# Altium PCB STM32_Blue pill.PcbDoc
Units mil, origin at the board's own origin, x right, y up, seen from the top; angles counter-clockwise.
Board outline 2215.03 x 1025.03 mil, 2 copper layers (Top Layer, Bottom Layer); 36 components, 52 nets, 176 pads, 42 vias.
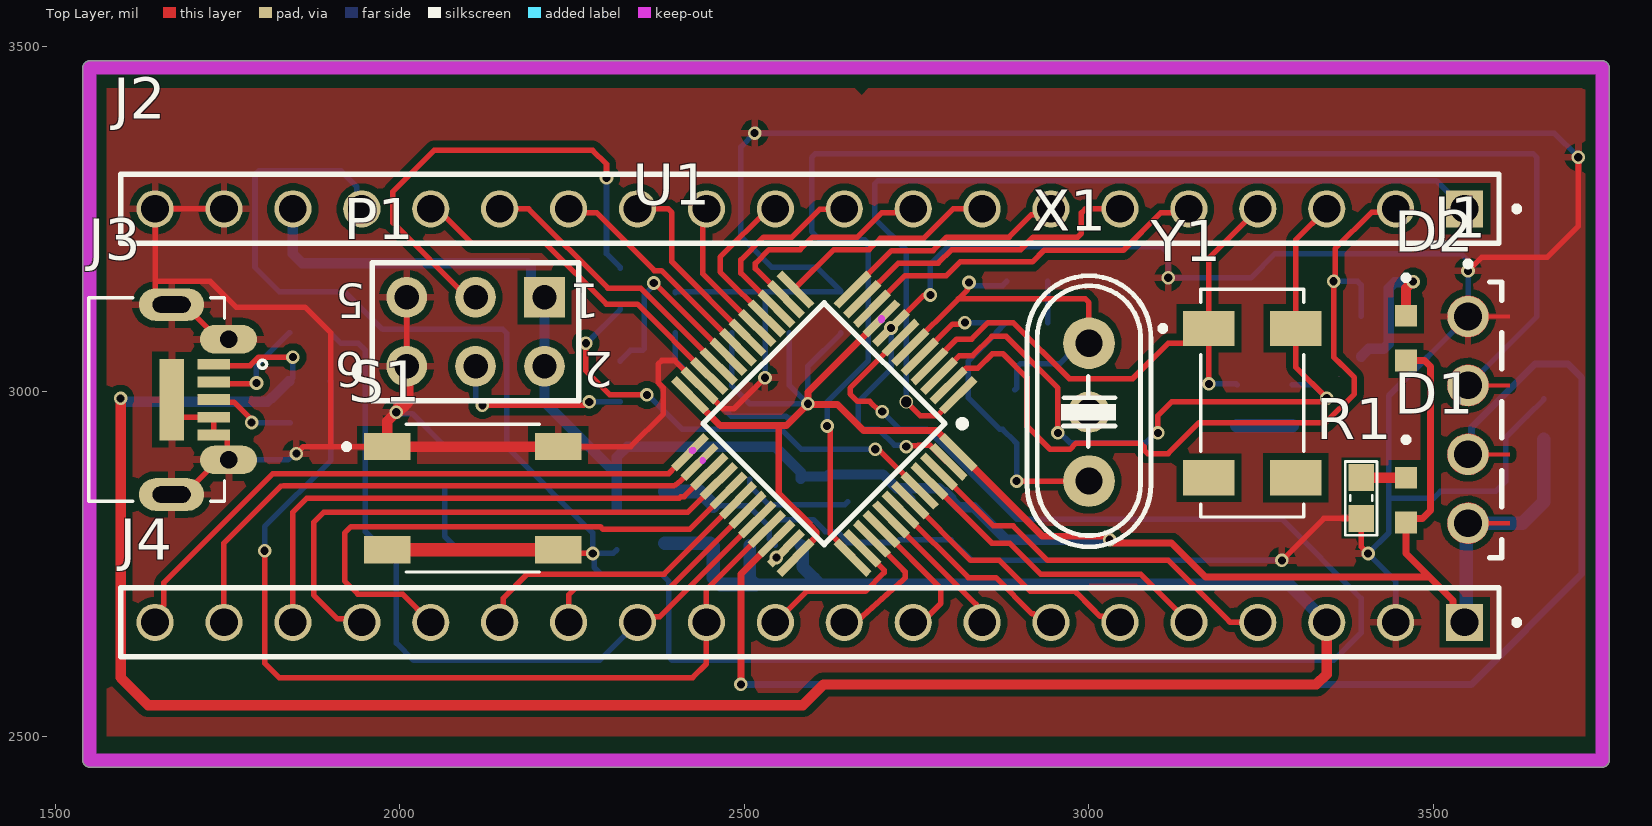
[diagram p0: Top Layer view]
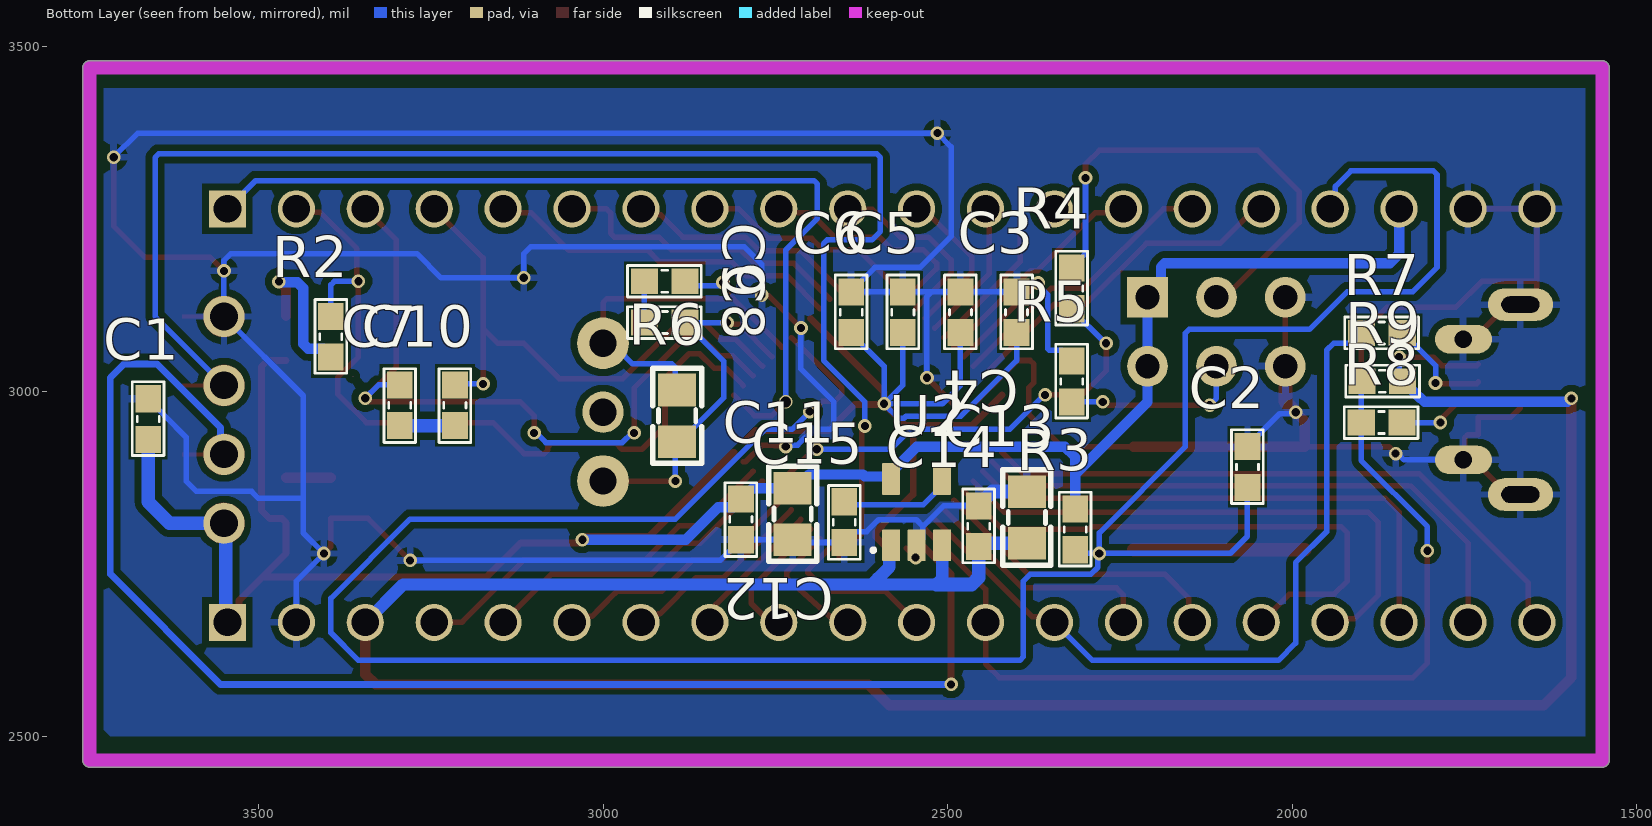
[diagram p1: Bottom Layer view, seen from below]
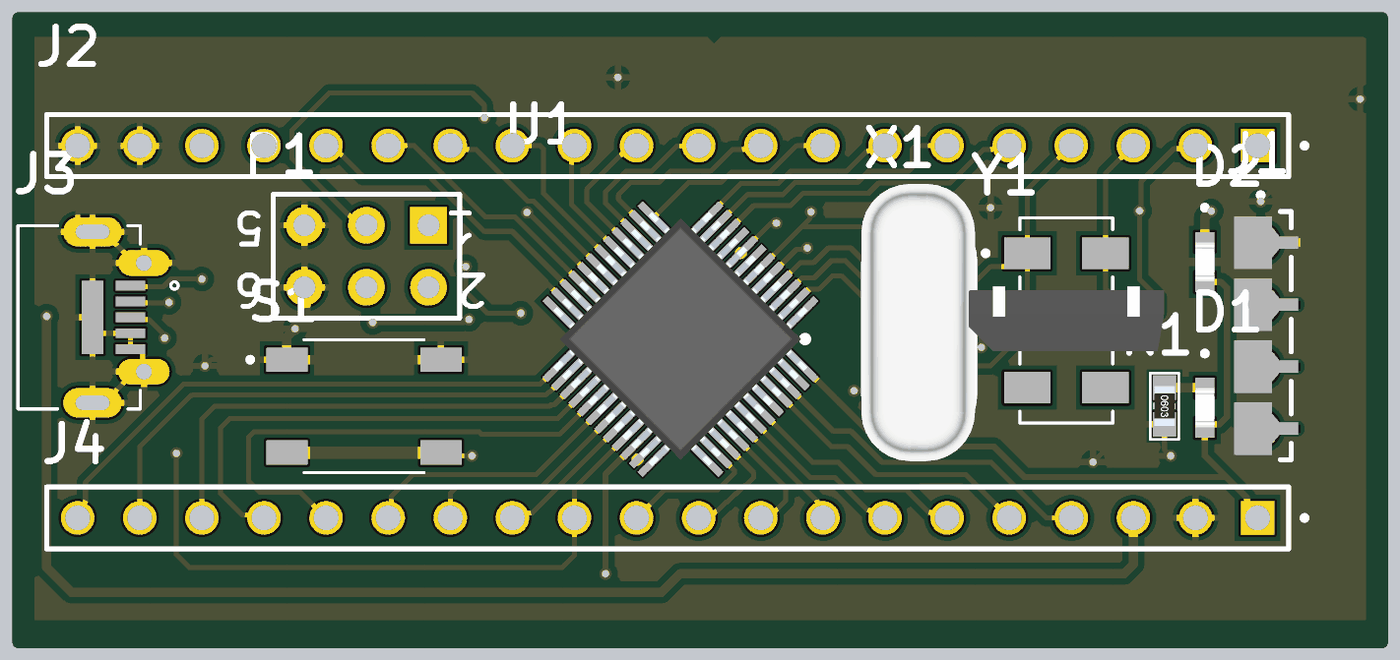
[diagram p2: 3D render of the assembled board from above, using the file's embedded part models]
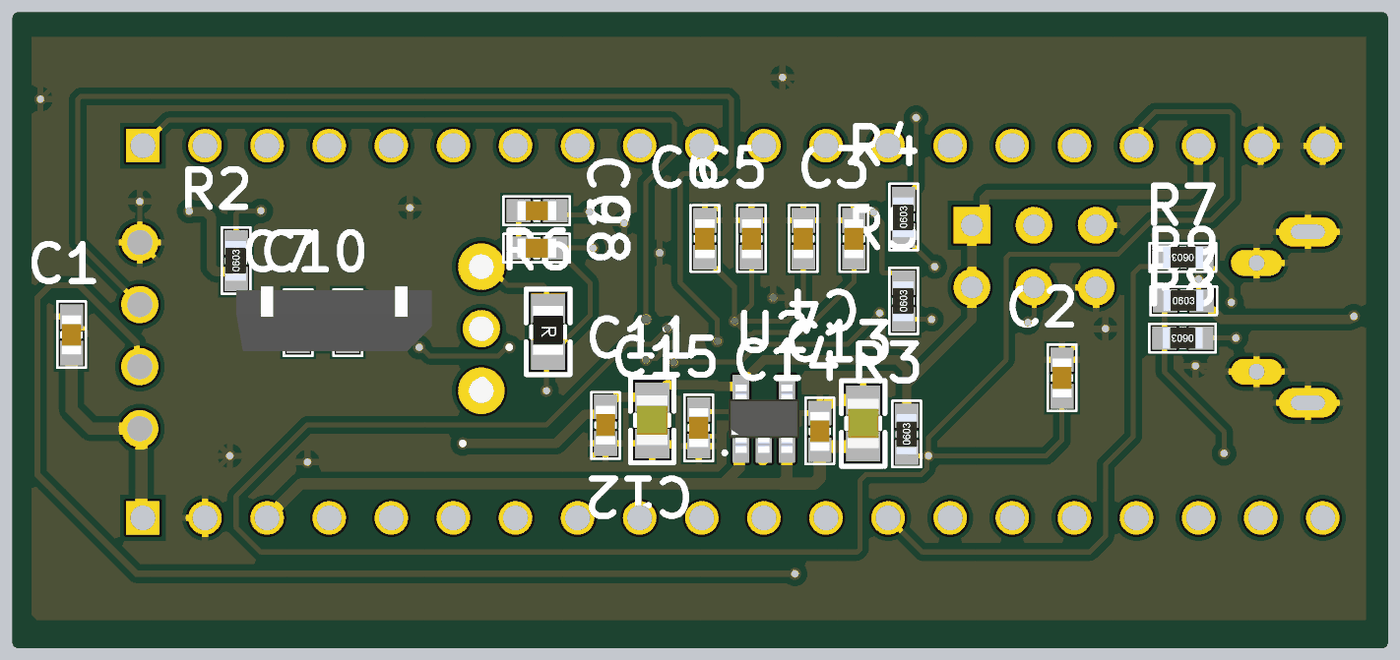
[diagram p3: 3D render of the assembled board from below, using the file's embedded part models]

## Layer stack, top to bottom
Top Solder: solder mask 0.4, Solder Resist, Dk 3.5
Top Layer: signal copper 1.4
Dielectric 1: dielectric 12.6, FR-4, Dk 4.8
Bottom Layer: signal copper 1.4
Bottom Solder: solder mask 0.4, Solder Resist, Dk 3.5

## Board outline
1550,2454.99 cw(c1550,2465) 1539.98,2465 1539.98,3470 cw(c1550,3470) 1550,3480.01 3745,3480.01 cw(c3745,3470) 3755.01,3470 3755.01,2465 cw(c3745,2465) 3745,2454.99

## Design rules (kind name [scope] priority, off if disabled: settings)
Clearance Clearance_1 [All] p1: gap=10 ignorepadtopadclearanceinfootprint=FALSE
Clearance Clearance_1 [OnMid vs OnMid] p2: gap=10 ignorepadtopadclearanceinfootprint=FALSE sourcerule=43 cellrowname=All cellrowtype=0 cellcolname=All cellcoltype=0 innerlayers=TRUE
Clearance Clearance_2 [(ExistsOnLayer('Top Layer') Or ExistsOnLayer('Bottom Layer')) vs (ExistsOnLayer('Top Layer') Or ExistsOnLayer('Bottom Layer'))] p3: gap=10 ignorepadtopadclearanceinfootprint=FALSE sourcerule=43 cellrowname=All cellrowtype=0 cellcolname=All cellcoltype=0 outerlayers=TRUE
Clearance [All] p4: gap=10 ignorepadtopadclearanceinfootprint=FALSE ismatrix=TRUE
PolygonConnect [All] p1: connectstyle=Relief reliefconductorwidth=10 reliefentries=4 polygonreliefangle="90 Angle" airgapwidth=10
RoutingPriority RoutingPriority_1 [All] p1: routingpriority=0
RoutingVias RoutingViaStyle_1 [All] p1: holewidth=10 width=19.68 viastyle="Through Hole" minholewidth=15.75 minwidth=15.75 maxholewidth=10 maxwidth=27.56
RoutingVias [All] p2: holewidth=28 width=50 viastyle="Through Hole" minholewidth=28 minwidth=50 maxholewidth=28 maxwidth=50
ShortCircuit ShortCircuit_1 [All] p1: allowed=FALSE
ShortCircuit [All] p2: allowed=FALSE
SolderMaskExpansion [All] p1: expansion=4 istentingtop=FALSE
SupplyNets "Schematic Supply Nets_2" [InNet('5V')] p1: voltage=0.000
SupplyNets "Schematic Supply Nets_1" [InNet('3.3V')] p2: voltage=0.000
SupplyNets "Schematic Supply Nets" [InNet('GND')] p3: voltage=0.000
Width MaxMinWidth_1 [All] p1: maxlimit=20 minlimit=8 preferedwidth=15 minimp=50.000000 maximp=50.000000 favimp=50.000000
Width [All] p2: maxlimit=10 minlimit=10 preferedwidth=10
28 further rules are at their usual default settings.

## Classes and differential pairs
component class Sheet1: C1 C2 C3 C4 C5 C6 C7 C9 C10 C11 C12 C13 C14 C15 D1 D2 J1 J2 J3 J4 P1 R1 R2 R3 R4 R5 R6 R8 S1 U1 U2 X1 Y1

## Components (designator, comment, footprint, x,y, rotation, side; value= is the part's Value field where it differs from the comment)
C1 "104" "tu 0603" 3660,2960 r90 bottom
C2 "105" "tu 0603" 2065,2890.47 r90 bottom
C3 "104" "tu 0603" 2400,3115 r90 bottom
C4 "104" "tu 0603" 2481.48,3115 r90 bottom
C5 "104" "tu 0603" 2565,3115 r90 bottom
C6 "104" "tu 0603" 2640,3115 r90 bottom
C7 "22pF" "tu 0603" 3295,2980 r270 bottom
C8 "22pF" "tu 0603" 2910.47,3100 r0 bottom
C9 "22pF" "tu 0603" 2910.47,3160 r0 bottom
C10 "22pF" "tu 0603" 3215,2980 r270 bottom
C11 "106" "tu 0805" 2724.87,2822.57 r270 bottom
C12 "104" "tu 0603" 2800,2814.53 r270 bottom
C13 "105" "tu 0805" 2385.13,2817.23 r90 bottom
C14 "104" "tu 0603" 2455,2804.53 r90 bottom
C15 "22pF" "tu 0603" 2650,2810.47 r270 bottom
D1 "LED" LED_KP-1608SURCK 3460,2842.52 r270 top
D2 "LED" LED_KP-1608SURCK 3460,3077.48 r270 top
J1 "MTLW-104-X-X-S-X" SAMTEC_MTLW-104-X-X-S-X 3550,2958.86 r90 top
J2 "TSW-120-05-T-S-LL" SAMTEC_TSW-120-05-T-S-LL 3545,3265 r180 top
J3 "UJ2-MIBH2-4-SMT" CUI_UJ2-MIBH2-4-SMT 1730,3039.52 r0 top
J4 "TSW-120-05-T-S-LL" SAMTEC_TSW-120-05-T-S-LL 3545,2665 r180 top
P1 "Header 3X2" HDR2X3 2210,3136.7 r180 top
R1 "510R" "tro smd 0603" 3395,2845.47 r270 top
R2 "510R" "tro smd 0603" 3395,3079.53 r90 bottom
R3 "10k" "tro smd 0603" 2315,2799.92 r90 bottom
R4 "100k" "tro smd 0603" 2320,3149.53 r90 bottom
R5 "100k" "tro smd 0603" 2320,3014.53 r90 bottom
R6 "1M" "tro smd 0805" 2890,2965 r270 bottom
R7 "220R" "tro smd 0603" 1870,3085 r0 bottom
R8 "220R" "tro smd 0603" 1870.47,2955 r0 bottom
R9 "4.7k" "tro smd 0603" 1869.53,3015 r180 bottom
S1 "Reset" SW_8-1437565-1 2105.98,2845.2 r0 top
U1 "STM32F103C8T6" LQFP-48_19.6_393_58X11_SMD 2615.74,2953.3 r225 top
U2 "RT9193-33GB" SOT94P279X129-5N 2545,2825 r90 bottom
X1 "8Mhz" XT2 3000,2970 r270 top value=4Mhz
Y1 "ABS25-32-768KHZ-T" XTAL_ABS25-32-768KHZ-T 3237.01,2983.27 r0 top

## Footprints (in the part's own frame and the unit in brackets; to place one, negate y for a bottom-side part, rotate by r counter-clockwise, add the part's x,y. Pads: shape width x height; smd on the part's side, far side on the other; paste and mask are expansions set on the pad)
CUI_UJ2-MIBH2-4-SMT [mm]
  rect 1.2x0.4 smd: 1(0,0) 2(0,-0.65) 3(0,-1.3) 4(0,-1.95) 5(0,-2.6)
  oval 2.4x1.2 hole 0.6 slot 1.4 at 0 deg: SH1(-1.55,2.2) SH4(-1.55,-4.8)
  oval 2.1x1.05 hole 0.65: SH2(0.55,0.925) SH5(0.55,-3.525)
  rect 0.9x3 smd: SH3(-1.55,-1.3)
  silkscreen extent -4.6,-5.05 1.95,2.45
HDR2X3 [mm] "Connector; Header; 3x2 Position"
  rect 1.5x1.5 hole 0.9: 1(0,0)
  round 1.5 hole 0.9: 2(0,2.54) 3(2.54,0) 4(2.54,2.54) 5(5.08,0) 6(5.08,2.54)
  silkscreen extent -1.27,-1.27 6.35,3.81, body extent -1.27,-1.27 6.35,3.81, height 7
LED_KP-1608SURCK [mm]
  rect 0.8x0.8 smd: 1(0.825,0) 2(-0.825,0)
  silkscreen extent -2.32,-0.1 -2.13,0.1, body extent -0.8,-0.4 0.8,0.4, height 1.1
LQFP-48_19.6_393_58X11_SMD [mm] "48LQFP"
  rect 1.7x0.3 smd mask+0.076: 1(-4.238,2.75) 2(-4.238,2.25) 3(-4.238,1.75) 4(-4.238,1.25) 5(-4.238,0.75) 6(-4.238,0.25) 7(-4.238,-0.25) 8(-4.238,-0.75) 9(-4.238,-1.25) 10(-4.238,-1.75) 11(-4.238,-2.25) 12(-4.238,-2.75) 25(4.238,-2.75) 26(4.238,-2.25) 27(4.238,-1.75) 28(4.238,-1.25) 29(4.238,-0.75) 30(4.238,-0.25) 31(4.238,0.25) 32(4.238,0.75) 33(4.238,1.25) 34(4.238,1.75) 35(4.238,2.25) 36(4.238,2.75)
  rect 0.3x1.7 smd mask+0.076: 13(-2.75,-4.238) 14(-2.25,-4.238) 15(-1.75,-4.238) 16(-1.25,-4.238) 17(-0.75,-4.238) 18(-0.25,-4.238) 19(0.25,-4.238) 20(0.75,-4.238) 21(1.25,-4.238) 22(1.75,-4.238) 23(2.25,-4.238) 24(2.75,-4.238) 37(2.75,4.238) 38(2.25,4.238) 39(1.75,4.238) 40(1.25,4.238) 41(0.75,4.238) 42(0.25,4.238) 43(-0.25,4.238) 44(-0.75,4.238) 45(-1.25,4.238) 46(-1.75,4.238) 47(-2.25,4.238) 48(-2.75,4.238)
  silkscreen extent -3.72,-3.15 3.15,3.72, body extent -4.5,-4.5 4.5,4.5, height 1.7
SAMTEC_MTLW-104-X-X-S-X [mm]
  round 1.52 hole 1.02: 01(3.81,0) 02(1.27,0) 03(-1.27,0) 04(-3.81,0)
  Top Layer region: 3.889,0.756 3.968,0.743 4.045,0.723 4.119,0.694 4.19,0.658 4.257,0.615 4.319,0.565 4.375,0.509 4.425,0.447 4.468,0.38 4.504,0.309 4.533,0.235 4.553,0.158 4.566,0.079 4.57,0 4.569,-0.038 4.566,-0.076 4.562,-0.113 4.555,-0.151 4.547,-0.187 4.537,-0.224 4.525,-0.259 4.511,-0.294 4.496,-0.329 4.479,-0.363 4.46,-0.395 4.44,-0.427 4.418,-0.458 4.395,-0.487 4.37,-0.516 4.344,-0.543 4.316,-0.569 4.287,-0.593 4.258,-0.616 4.227,-0.638 4.195,-0.658 4.162,-0.676 4.128,-0.692 4.093,-0.707 4.058,-0.721 4.022,-0.732 3.986,-0.742 3.949,-0.75 3.912,-0.756 3.875,-0.76 3.875,-1.53 3.745,-1.53 3.745,-0.76 3.708,-0.756 3.671,-0.75 3.634,-0.742 3.598,-0.732 3.562,-0.721 3.527,-0.707 3.492,-0.692 3.458,-0.676 3.425,-0.658 3.393,-0.638 3.362,-0.616 3.333,-0.593 3.304,-0.569 3.276,-0.543 3.25,-0.516 3.225,-0.487 3.202,-0.458 3.18,-0.427 3.16,-0.395 3.141,-0.363 3.124,-0.329 3.109,-0.294 3.095,-0.259 3.083,-0.224 3.073,-0.187 3.065,-0.151 3.058,-0.113 3.054,-0.076 3.051,-0.038 3.05,0 3.054,0.079 3.067,0.158 3.087,0.235 3.116,0.309 3.152,0.38 3.195,0.447 3.245,0.509 3.301,0.565 3.363,0.615 3.43,0.658 3.501,0.694 3.575,0.723 3.652,0.743 3.731,0.756 3.81,0.76
  Top Layer region: 1.349,0.756 1.428,0.743 1.505,0.723 1.579,0.694 1.65,0.658 1.717,0.615 1.779,0.565 1.835,0.509 1.885,0.447 1.928,0.38 1.964,0.309 1.993,0.235 2.013,0.158 2.026,0.079 2.03,0 2.029,-0.038 2.026,-0.076 2.022,-0.113 2.015,-0.151 2.007,-0.187 1.997,-0.224 1.985,-0.259 1.971,-0.294 1.956,-0.329 1.939,-0.363 1.92,-0.395 1.9,-0.427 1.878,-0.458 1.855,-0.487 1.83,-0.516 1.804,-0.543 1.776,-0.569 1.747,-0.593 1.718,-0.616 1.687,-0.638 1.655,-0.658 1.622,-0.676 1.588,-0.692 1.553,-0.707 1.518,-0.721 1.482,-0.732 1.446,-0.742 1.409,-0.75 1.372,-0.756 1.335,-0.76 1.335,-1.53 1.205,-1.53 1.205,-0.76 1.168,-0.756 1.131,-0.75 1.094,-0.742 1.058,-0.732 1.022,-0.721 0.987,-0.707 0.952,-0.692 0.918,-0.676 0.885,-0.658 0.853,-0.638 0.822,-0.616 0.793,-0.593 0.764,-0.569 0.736,-0.543 0.71,-0.516 0.685,-0.487 0.662,-0.458 0.64,-0.427 0.62,-0.395 0.601,-0.363 0.584,-0.329 0.569,-0.294 0.555,-0.259 0.543,-0.224 0.533,-0.187 0.525,-0.151 0.518,-0.113 0.514,-0.076 0.511,-0.038 0.51,0 0.514,0.079 0.527,0.158 0.547,0.235 0.576,0.309 0.612,0.38 0.655,0.447 0.705,0.509 0.761,0.565 0.823,0.615 0.89,0.658 0.961,0.694 1.035,0.723 1.112,0.743 1.191,0.756 1.27,0.76
  Top Layer region: -1.191,0.756 -1.112,0.743 -1.035,0.723 -0.961,0.694 -0.89,0.658 -0.823,0.615 -0.761,0.565 -0.705,0.509 -0.655,0.447 -0.612,0.38 -0.576,0.309 -0.547,0.235 -0.527,0.158 -0.514,0.079 -0.51,0 -0.511,-0.038 -0.514,-0.076 -0.518,-0.113 -0.525,-0.151 -0.533,-0.187 -0.543,-0.224 -0.555,-0.259 -0.569,-0.294 -0.584,-0.329 -0.601,-0.363 -0.62,-0.395 -0.64,-0.427 -0.662,-0.458 -0.685,-0.487 -0.71,-0.516 -0.736,-0.543 -0.764,-0.569 -0.793,-0.593 -0.822,-0.616 -0.853,-0.638 -0.885,-0.658 -0.918,-0.676 -0.952,-0.692 -0.987,-0.707 -1.022,-0.721 -1.058,-0.732 -1.094,-0.742 -1.131,-0.75 -1.168,-0.756 -1.205,-0.76 -1.205,-1.53 -1.335,-1.53 -1.335,-0.76 -1.372,-0.756 -1.409,-0.75 -1.446,-0.742 -1.482,-0.732 -1.518,-0.721 -1.553,-0.707 -1.588,-0.692 -1.622,-0.676 -1.655,-0.658 -1.687,-0.638 -1.718,-0.616 -1.747,-0.593 -1.776,-0.569 -1.804,-0.543 -1.83,-0.516 -1.855,-0.487 -1.878,-0.458 -1.9,-0.427 -1.92,-0.395 -1.939,-0.363 -1.956,-0.329 -1.971,-0.294 -1.985,-0.259 -1.997,-0.224 -2.007,-0.187 -2.015,-0.151 -2.022,-0.113 -2.026,-0.076 -2.029,-0.038 -2.03,0 -2.026,0.079 -2.013,0.158 -1.993,0.235 -1.964,0.309 -1.928,0.38 -1.885,0.447 -1.835,0.509 -1.779,0.565 -1.717,0.615 -1.65,0.658 -1.579,0.694 -1.505,0.723 -1.428,0.743 -1.349,0.756 -1.27,0.76
  Top Layer region: -3.731,0.756 -3.652,0.743 -3.575,0.723 -3.501,0.694 -3.43,0.658 -3.363,0.615 -3.301,0.565 -3.245,0.509 -3.195,0.447 -3.152,0.38 -3.116,0.309 -3.087,0.235 -3.067,0.158 -3.054,0.079 -3.05,0 -3.051,-0.038 -3.054,-0.076 -3.058,-0.113 -3.065,-0.151 -3.073,-0.187 -3.083,-0.224 -3.095,-0.259 -3.109,-0.294 -3.124,-0.329 -3.141,-0.363 -3.16,-0.395 -3.18,-0.427 -3.202,-0.458 -3.225,-0.487 -3.25,-0.516 -3.276,-0.543 -3.304,-0.569 -3.333,-0.593 -3.362,-0.616 -3.393,-0.638 -3.425,-0.658 -3.458,-0.676 -3.492,-0.692 -3.527,-0.707 -3.562,-0.721 -3.598,-0.732 -3.634,-0.742 -3.671,-0.75 -3.708,-0.756 -3.745,-0.76 -3.745,-1.53 -3.875,-1.53 -3.875,-0.76 -3.912,-0.756 -3.949,-0.75 -3.986,-0.742 -4.022,-0.732 -4.058,-0.721 -4.093,-0.707 -4.128,-0.692 -4.162,-0.676 -4.195,-0.658 -4.227,-0.638 -4.258,-0.616 -4.287,-0.593 -4.316,-0.569 -4.344,-0.543 -4.37,-0.516 -4.395,-0.487 -4.418,-0.458 -4.44,-0.427 -4.46,-0.395 -4.479,-0.363 -4.496,-0.329 -4.511,-0.294 -4.525,-0.259 -4.537,-0.224 -4.547,-0.187 -4.555,-0.151 -4.562,-0.113 -4.566,-0.076 -4.569,-0.038 -4.57,0 -4.566,0.079 -4.553,0.158 -4.533,0.235 -4.504,0.309 -4.468,0.38 -4.425,0.447 -4.375,0.509 -4.319,0.565 -4.257,0.615 -4.19,0.658 -4.119,0.694 -4.045,0.723 -3.968,0.743 -3.889,0.756 -3.81,0.76
  silkscreen extent -5.08,-1.24 5.85,0.1
SAMTEC_TSW-120-05-T-S-LL [mm]
  rect 1.37x1.37 hole 1.02: 01(0,0)
  round 1.37 hole 1.02: 02(2.54,0) 03(5.08,0) 04(7.62,0) 05(10.16,0) 06(12.7,0) 07(15.24,0) 08(17.78,0) 09(20.32,0) 10(22.86,0) 11(25.4,0) 12(27.94,0) 13(30.48,0) 14(33.02,0) 15(35.56,0) 16(38.1,0) 17(40.64,0) 18(43.18,0) 19(45.72,0) 20(48.26,0)
  silkscreen extent -2.02,-1.27 49.53,1.27
SOT94P279X129-5N [mm]
  rrect12% 1.17x0.67 smd: 1(-1.22,0.94) 2(-1.22,0) 3(-1.22,-0.94) 4(1.22,-0.94) 5(1.22,0.94)
  silkscreen extent -1.47,1.53 -1.33,1.67, body extent -1.4,-1.45 1.4,1.45, height 1.3
SW_8-1437565-1 [mm]
  rect 1.7x1 smd: 1(-3.15,1.9) 2(3.15,1.9) 3(-3.15,-1.9) 4(3.15,-1.9)
  silkscreen extent -4.75,-2.72 2.45,2.72
"tro smd 0603" [mm] "Chip Capacitor, 2-Leads, Body 1,60x0,80mm, IPC Medium Density"
  rect 1x0.95 smd mask+0.076: 1(-0.75,0) 2(0.75,0)
  silkscreen extent -1.35,-0.58 1.37,0.58, body extent -0.82,-0.42 0.82,0.43, height 0.44
"tro smd 0805" [mm]
  rect 1.2x1.4 smd: 1(-0.946,-0.061) 2(0.954,-0.061)
  silkscreen extent -1.75,-0.97 1.75,0.84, body extent -1.56,-0.76 1.44,0.64, height 0.53
"tu 0603" [mm] "Chip Capacitor, 2-Leads, Body 1,60x0,80mm, IPC Medium Density"
  rect 1x0.95 smd mask+0.076: 1(-0.75,0) 2(0.75,0)
  silkscreen extent -1.35,-0.58 1.37,0.58, body extent -0.8,-0.4 0.8,0.4, height 0.9
"tu 0805" [mm] "Compoment SMD 80x50mil"
  rect 1.2x1.4 smd: 1(-0.946,-0.003) 2(0.954,-0.003)
  silkscreen extent -1.75,-0.89 1.75,0.89, body extent -1.01,-0.64 1.01,0.63, height 0.61
XT2 [mm] "Footpin for Crystal 2 pin"
  round 1.524 hole 1: 0(0,0)
  round 1.905 hole 1: 1(-2.54,0) 2(2.54,0)
  silkscreen extent -5.03,-2.29 4.96,2.29, body extent -5.93,-2.36 5.42,2.29, height 3.5
XTAL_ABS25-32-768KHZ-T [mm]
  rect 1.9x1.3 smd: 1(-1.6,2.75) 2(-1.6,-2.75) 3(1.6,-2.75) 4(1.6,2.75)
  silkscreen extent -3.4,-4.2 1.9,4.2, body extent -4,-1.25 4,1.41, height 2

## Part data
C1 C3 C4 C5 C6 C12 C14: library part "Tu 0603 104 50V 10%", "Dán", Chung_Loai=Dán, Don_Vi=Con, Ma_Hang=MH004568, So_Chan=2, Ten_Linh_Kien="Tụ 0603 104-100nF 10% 50V"
C2: library part "Tu 0603 105 50V 10%", "Dán", Chung_Loai=Dán, Don_Vi=Con, Ma_Hang=MH004569, So_Chan=2, Ten_Linh_Kien="Tụ 0603 105-1uF 50V 10%"
C7 C8 C9 C10 C15: library part "Tu 0603 22pF 50V 10%", "Dán", Chung_Loai=Dán, Don_Vi=Con, Ma_Hang=MH004570, So_Chan=2, Ten_Linh_Kien="Tụ 0603 22pF 50V 10%"
C11: library part "Tu 0805 106 16V 10%", "Dán", Chung_Loai=Dán, Don_Vi=Con, Ma_Hang=MH004553, So_Chan=2, Ten_Linh_Kien="Tụ 0805 106-10uF 10% 16V"
C13: library part "Tu 0805 105 50V 10%", "Dán", Chung_Loai=Dán, Don_Vi=Con, Ma_Hang=MH004552, So_Chan=2, Ten_Linh_Kien="Tụ 0805 105-1uF 10% 50V"
D1 D2: library part KP-1608SURCK, "LED; SMD; 0603; red; 50-150mcd; 1.6x0.8mm; 120Â°; 20mA;", Package="0603 Kingbright", Check_prices=https://www.snapeda.com/parts/KP-1608SURCK/Kingbright/view-part/?ref=eda, MF=Kingbright, MP=KP-1608SURCK, SnapEDA_Link=https://www.snapeda.com/parts/KP-1608SURCK/Kingbright/view-part/?ref=snap
J1 J2 J4: Package=None, Availability=Unavailable, Price=None
  J1: MF="{'manufacturer': u'Samtec Inc.'}", MP=MTLW-104-X-X-S-X
  J2 J4: MP=TSW-120-05-T-S-LL
J3: "Micro B, USB 2.0, 1.8 A, Right Angle, Surface Mount (SMT), USB Receptacle", Package=None, Availability="In Stock", Check_prices=https://www.snapeda.com/parts/UJ2-MIBH2-4-SMT/CUI+Devices/view-part/?ref=eda, CUI_purchase_URL=https://www.cuidevices.com/product/interconnect/connectors/usb-connectors/uj2-mibh2-4-smt?utm_source=snapeda.com&utm_medium=referral&utm_campaign=snapedaBOM, MF="CUI Devices", MP=UJ2-MIBH2-4-SMT, Price=None, Purchase-URL=https://pricing.snapeda.com/search/part/UJ2-MIBH2-4-SMT/?ref=eda, SnapEDA_Link=https://www.snapeda.com/parts/UJ2-MIBH2-4-SMT/CUI+Devices/view-part/?ref=snap
P1: "Header, 3-Pin, Dual row", LatestRevisionDate=17-Jul-2002, LatestRevisionNote="Re-released for DXP Platform.", Publisher="Altium Limited"
R1 R2: library part "Tro 0603 5% 510R", "Dán", Chung_Loai=Dán, Don_Vi=Con, Ma_Hang=MH007667, So_Chan=2, Ten_Linh_Kien="Trở 0603 5% 510R"
R3: library part "Tro 0603 1% 10k", "Dán", Chung_Loai=Dán, Don_Vi=Con, Ma_Hang=MH006333, So_Chan=2, Ten_Linh_Kien="Trở 0603 1% 10k"
R4 R5: library part "Tro 0603 5% 100k", "Dán", Chung_Loai=Dán, Don_Vi=Con, Ma_Hang=MH006314, So_Chan=2, Ten_Linh_Kien="Trở 0603 5% 100k"
R6: library part "Tro 0805 1% 1M", "Dán", Chung_Loai=Dán, Don_Vi=Con, Ma_Hang=MH005469, So_Chan=2, Ten_Linh_Kien="Trở 0805 1% 1M"
R7 R8: library part "Tro 0603 5% 220R", "Dán", Chung_Loai=Dán, Don_Vi=Con, Ma_Hang=MH006322, So_Chan=2, Ten_Linh_Kien="Trở 0603 5% 220R"
R9: library part "Tro 0603 5% 4.7k", "Dán", Chung_Loai=Dán, Don_Vi=Con, Ma_Hang=MH006327, So_Chan=2, Ten_Linh_Kien="Trở 0603 5% 4.7k"
S1: library part 8-1437565-1, Package=None, Availability=Unavailable, MP=8-1437565-1, Price=None
U1: library part IC_STM32F103C8T6, "ARM® Cortex®-M3 STM32F1 Microcontroller IC 32-Bit 72MHz 64KB (64K x 8) FLASH 48-LQFP (7x7)", Alternate Part Number-1=NA, Case/Package=LQFP48, Manufacturer=STMicroelectronics, Manufacturer Part Number=STM32F103C8T6, Supplier Part Number-1=STM32F103C8T6, Supplier-1=LCSC
U2: "Linear Voltage Regulator IC Positive Fixed 1 Output 300mA TSOT-23-5", Package="SOT-23-5 Richtek", Check_prices=https://www.snapeda.com/parts/RT9193-33GB/Richtek+USA+Inc./view-part/?ref=eda, Digi-Key_Part_Number=1028-1014-2-ND, MF="Richtek USA", MP=RT9193-33GB, Purchase-URL=https://pricing.snapeda.com/search/part/RT9193-33GB/?ref=eda, SnapEDA_Link=https://www.snapeda.com/parts/RT9193-33GB/Richtek+USA+Inc./view-part/?ref=snap
X1: library part XT2, "Crystal For all Crystal 2pin."
Y1: "Crystal 0.032768MHz Â±20ppm (Tol) 12.5pF FUND 50000Ohm 4-Pin SMD T/R", Package=Package, Check_prices=https://www.snapeda.com/parts/ABS25-32-768KHZ-T/Abracon/view-part/?ref=eda, MF=Abracon, MP=ABS25-32-768KHZ-T, SnapEDA_Link=https://www.snapeda.com/parts/ABS25-32-768KHZ-T/Abracon/view-part/?ref=snap

## Via types
v1: diameter 19.68, hole 11.81, Top Layer to Bottom Layer, tented both sides, 40 vias
v2: diameter 19.68, hole 15.75, Top Layer to Bottom Layer, tented both sides, 1 vias
v3: diameter 0.5, hole 0.3, Top Layer to Bottom Layer, 1 vias

## Nets (pads, with @x,y where several pads share a name; then routed paths per layer and width w, separated by ;. In a path a pad name is that pad's centre, name@x,y a point inside that pad or via, vN(x,y) a via of type N, cw(c..) or ccw(c..) an arc to the next point about the centre after c; other vN are vias at no path point)
3.3V: C1.1 C3.1 C4.1 C5.1 C6.1 C11.1 C12.1 D1.1 D2.1 J1.04 J2.18 J4.01 P1.1 P1.2 R3.2 U1.9 U1.24 U1.36 U1.48 U2.5 | length 4787.4
  Top Layer w8: J1.04@3550,2800 J1.04@3550,2804.43
  Top Layer w10: U1.24 2465,2950.92 2550,2950.92 ; U1.36 2604.15,2788.6 2604.15,2796.05 2594.91,2805.29 ; 2595.62,2805.99 2551.41,2850.2 2550,2850.2 2550,2950.92 ; U1.9 2592.15,2999.31 v1(2592.15,2982.15) ; U1.48@2791.92,2930.24 2778.65,2943.5 2672.83,2943.5 2635.03,2981.3 2593,2981.3 v1(2592.15,2982.15) ; U1.48 2810.59,2911.88 2932.46,2790 3025,2790 v1(3030,2785) 3035,2780 3120,2780 3169.02,2730.98 3494.02,2730.98 ; D2.1 3486.96,3045 3495.75,3036.21 3495.75,2827.5 3484.03,2815.79 3465.75,2815.79 D1.1 3460,2765 3494.02,2730.98 ; J4.01 3528.03,2681.97 3528.03,2696.97 3494.02,2730.98 ; 2550,2950.92 2560.92,2950.92 v1(2592.15,2982.15)
  Top Layer w20: J1.04@3550,2804.43 J1.04
  Bottom Layer w8: C3.1 2400,3045 2480.85,2964.15 2560.13,2964.15 2563.41,2960.87 2570.87,2960.87 v1(2592.15,2982.15) ; C4.1 2481.48,3008.52 2507.85,2982.15 v1(2592.15,2982.15) ; C5.1 2565,3009.3 v1(2592.15,2982.15) ; C6.1 2640,3084.49 2592.15,3036.64 v1(2592.15,2982.15)
  Bottom Layer w15: J2.18 1845,3200 1858.77,3186.23 2185,3186.23 2190.47,3180.75 2190.47,3156.23 P1.1 P1.2 2210,2985 2315,2880 ; R3.2 2315,2880 ; U2.5 U2.5@2582.01,2873.62 ; C11.1@2740.75,2844.06 C11.1 ; v1(3030,2785) 2880,2785 2833.13,2831.87 2811.2,2831.87 2800,2843.07 C12.1 2800,2845.04 2791.3,2853.74 2788.58,2853.74 2782.51,2859.8 C11.1 ; 2315,2880 2315,2905 2330,2920 2544.88,2920 2582.01,2882.87 U2.5@2582.01,2873.62 ; U2.5@2582.01,2873.62 2585.2,2876.81 2620.14,2876.81 2623.01,2879.69 2701.18,2879.69 2721.06,2859.8 C11.1
  Bottom Layer w20: J4.01 3547.5,2667.5 3547.5,2806.36 J1.04 3628.86,2808.86 3660,2840 C1.1
5V: C13.1 C14.1 J3.1 J4.03 R9.2 U2.1 U2.3 | length 3841.8
  Top Layer w8: J3.1 1732.05,3037.47 1782.89,3037.47 1795.42,3050 v1(1845,3050)
  Top Layer w15: v1(1595,2990) 1595,2585 1635,2545 2585,2545 2615,2575 3330,2575 3345,2590 J4.03
  Bottom Layer w8: R9.2 1845,3020 v1(1845,3050) ; C14.1@2450,2780 C14.1
  Bottom Layer w15: v1(1595,2990) 1596.27,2990 1601.26,2985.01 1807.82,2985.01 1814.01,2991.2 1815.22,2991.2 1839.02,3015 R9.2
  Bottom Layer w18: U2.3 2507.99,2728.2 2516.19,2720 2599.41,2720 ; U2.1 2584.6,2774.38 2584.6,2745.4 2601.21,2728.79 2607.99,2722.01 2607.29,2721.8 ; 2601.21,2720 3290,2720 J4.03
  Bottom Layer w20: C13.1 C14.1@2450,2780 ; C14.1 2455,2730 2465,2720 2516.19,2720
BOOTT0: R4.1 U1.44 | length 667.9
  Top Layer w8: v1(2270,3070) 2270,3030 2305,2995 v1(2358.54,2995) ; v1(2690,2916.16) 2692.24,2913.92 2696.87,2913.92 U1.44
  Bottom Layer w8: v1(2270,3070) 2270.98,3070 2320,3119.02 R4.1 ; v1(2358.54,2995) 2360,2995 2410,2945 2553.82,2945 2582.67,2916.16 v1(2690,2916.16)
BOOTT1: R5.2 U1.20 | length 298.4
  Top Layer w8: v1@2367.45,3157.45 v1(2368.64,3157.45) 2369.83,3157.45 U1.20
  Bottom Layer w8: R5.2 2320,3045.04 2334.7,3059.74 2352.44,3059.74 2355,3062.3 2355,3140.65 2367.45,3153.09 2367.45,3157.45 v1(2368.64,3157.45)
GND: C1.2 C2.2 C3.2 C4.2 C5.2 C6.2 C11.2 C12.2 C13.2 C14.2 C15.2 J1.01 J2.19 J2.20 J3.4 J3.5 J3.SH1 J3.SH2 J3.SH3 J3.SH4 J3.SH5 J4.02 P1.5 P1.6 R1.2 S1.1 S1.2 U1.8 U1.23 U1.35 U1.47 U2.2 | length 7935.4
  Top Layer w8: J3.SH4 1686.69,2850.54 1736.89,2900.74 J3.SH5 1749.62,2902.77 1749.62,2933.28 1745.75,2937.15 J3.5 J3.4 1682.69,2962.74 1668.98,2976.46 J3.SH3 ; J2.19 J2.20 1645,3160 ; J3.SH2 1736.89,3075.93 1686.69,3126.13 J3.SH1 1663.13,3126.13 1645,3144.26 1645,3160 ; v1(1850,2910) 1860,2920 1900,2920 ; S1.1 1900,2920 ; P1.6 P1.5 ; S1.2 2335,2920 2382.39,2967.39 2382.39,3005.39 2375,3012.77 2375,3039.73 2380.27,3045 2398.76,3045 U1.23 2435.43,3008.64 2469.07,2975 2485,2975 v1(2530,3020) ; v1(2546.53,2759.13) 2547.4,2760 2547.71,2760 U1.35 ; v1(2712.84,3092.16) 2760.68,3140 v1(2770,3140) ; v1(2735,2920) 2736.27,2921.27 v1@2743.73,2921.27 ; U1.47 2793.66,2897.96 2769.62,2922 2752,2922 2751.23,2921.23 v1@2743.77,2921.23 ; v1(3280,2755) 3340.94,2815.94 R1.2 3395,2775 v1(3405,2765) ; v1(3550,3175) 3570,3195 3665,3195 3710,3240 v1(3710,3340) ; 1645,3160 1725,3160 1762.5,3122.5 1862.5,3122.5 1900,3085 1900,2920 ; v1@2743.73,2921.27 v1@2743.77,2921.23
  Top Layer w15: v1(1995,2970) 1981.97,2956.97 S1.1 S1.2
  Top Layer w20: v1(1995,2970) 2010,2985 P1.6
  Bottom Layer w8: J3.SH5 1837.57,2900.74 1846.84,2910 v1(1850,2910) ; v1(1995,2970) 1997.24,2967.76 2018.22,2967.76 2065,2920.98 C2.2 ; C3.2@2400,3143.54 C3.2 C4.2 2523.24,3144.53 ; C14.2 2506,2834.06 2535.81,2804.24 ; v1(2530,3020) 2530,3137.77 2523.24,3144.53 ; U2.2 2535.81,2786.16 2535.81,2804.24 ; v1(2712.84,3092.16) 2712.84,3032.84 2665,2985 2665,2950.27 2670.27,2945 2694.88,2945 2717.64,2922.24 2732.76,2922.24 v1(2735,2920) ; v1(2770,3140) 2770,3185 2795,3210 3105,3210 3115,3200 v1(3115,3165) 3235,3165 3270,3200 3540,3200 3550,3190 v1(3550,3175) J1.01 3435,2993.86 3435,2845 ; v1(3280,2755) 2830,2755 2815.69,2769.31 2814.7,2769.31 2800,2784.02 C12.2 C11.2 2720.94,2780.94 C15.2 2650,2781.93 2635.3,2796.63 2617.44,2796.63 2600.07,2814 2545.57,2814 2535.81,2804.24 ; J4.02 3445,2725 v1(3405,2765) 3435,2795 3435,2845 ; C1.2 3660,2988.54 3635.61,2964.16 3635.5,2964.16 3605,2933.66 3605,2870 3590,2855 3510,2855 3500,2845 3435,2845 ; v1(3710,3340) 3675,3375 v1(2515,3375) 2495,3355 2495,3225 2540,3180 2605.51,3180 2640,3145.51 C6.2 C5.2 2523.24,3144.53
  Bottom Layer w20: C13.2 2435.24,2854.8 2455,2835.04 C14.2
NetC7_2: C7.2 C10.2 | length 80
  Bottom Layer w20: C10.2 C7.2
NetC8_2: C8.2 C9.2 | length 60
  Bottom Layer w8: C8.2 C9.2
NetC15_1: C15.1 U2.4 | length 164.8
  Bottom Layer w8: U2.4 2507.99,2863.19 2535.18,2836 2646,2836 C15.1
NetD1_2: D1.2 R1.1 | length 65
  Top Layer w15: R1.1 D1.2
NetD2_2: D2.2 R2.1 | length 222.7
  Top Layer w15: D2.2 3460,3149.83 3469.66,3159.49 v1(3470.35,3159.49)
  Bottom Layer w15: R2.1 3395,3050.98 3406.2,3062.19 3427.68,3062.19 3435,3069.51 3435,3150 3443.6,3158.6 3469.46,3158.6 v1(3470.35,3159.49)
NetJ3_2: J3.2 R7.1 | length 156.7
  Top Layer w8: J3.2 1732.35,3011.58 1791.37,3011.58 v1(1792.14,3012.35)
  Bottom Layer w8: v1(1792.14,3012.35) 1792.14,3037.66 1839.49,3085 R7.1
NetJ3_3: J3.3 R8.1 | length 127.1
  Top Layer w8: J3.3 1733.72,2984.62 1759.42,2984.62 1782.76,2961.28 1782.76,2957.24 v1(1785,2955)
  Bottom Layer w8: v1(1785,2955) R8.1
NetP1_3: P1.3 R4.2 | length 712.2
  Top Layer w8: P1.3 2098.3,3136.7 1990,3245 1990,3290 2050,3350 2280,3350 2300,3330 v1(2300,3310)
  Bottom Layer w8: v1(2300,3310) 2300,3200.04 2320,3180.04 R4.2
NetP1_4: P1.4 R5.1 | length 262.9
  Top Layer w8: v1(2120,2980) 2266.84,2980 2271.84,2985 v1(2275,2985)
  Bottom Layer w8: P1.4 2110,2990 v1(2120,2980) ; v1(2275,2985) R5.1
OSCIN: C8.1 R6.2 U1.5 X1.2 | length 535
  Top Layer w8: U1.5 2754.91,3050.4 2802.31,3097.8 2817.73,3097.8 v1(2819.96,3100.04) ; v1(2895,2870) X1.2
  Bottom Layer w8: v1(2819.96,3100.04) 2879.92,3100.04 2879.96,3100 2865.26,3085.3 2865.26,3084.31 2825,3044.06 2825,2990.88 2870.88,2945 2874.82,2945 R6.2 2895,2924.82 v1(2895,2870)
OSCOUT: C9.1 R6.1 U1.6 X1.1 | length 592.4
  Top Layer w8: U1.6 2810.68,3134.32 ; v1(2825.94,3158.16) 2823.71,3155.93 2823.71,3147.35 2810.68,3134.32 ; X1.1 3000,3129.05 2994.73,3134.32 2810.68,3134.32
  Bottom Layer w8: v1(2825.94,3158.16) 2829.11,3158.16 2833.63,3153.64 2874.59,3153.64 C9.1 ; R6.1 2895,3004.83 2895,3034.73 2900.27,3040 2957.17,3040 2977.17,3060 2990,3060 X1.1
PA0: J2.05 U1.10 | length 520.1
  Top Layer w8: U1.10 2733.28,3168.28 2793.28,3168.28 2813.03,3188.03 2918.03,3188.03 2935,3205 3050,3205 3104.03,3259.03 3139.03,3259.03 J2.05
PA1: J2.06 U1.11 | length 445.6
  Top Layer w8: U1.11 2723.44,3186.28 2781.28,3186.28 2801.03,3206.03 2901.03,3206.03 2919.03,3224.03 2983.76,3224.03 2989.03,3229.3 2989.03,3259.03 2995,3265 J2.06
PA2: J2.07 U1.12 | length 336.4
  Top Layer w8: U1.12 2713.6,3204.28 2773.83,3204.28 2793.58,3224.03 2884.03,3224.03 2916.21,3256.21 2936.21,3256.21 J2.07
PA3: J2.08 U1.13 | length 320.8
  Top Layer w8: U1.13 2574.31,3150.53 2629.81,3206.03 2681.03,3206.03 2697.28,3222.28 2760.22,3222.28 2802.94,3265 J2.08
PA4: J2.09 U1.14 | length 332.3
  Top Layer w8: U1.14 2515.88,3178.43 2515.88,3185.88 2536.03,3206.03 2581.03,3206.03 2599.03,3224.03 2664.03,3224.03 2699.03,3259.03 2739.03,3259.03 J2.09
PA5: J2.10 U1.15 | length 273
  Top Layer w8: U1.15 2546.47,3120.31 2495,3171.79 2495,3191 2528.03,3224.03 2569.03,3224.03 2609.3,3264.3 2644.3,3264.3 J2.10
PA6: J2.11 U1.16 | length 225.9
  Top Layer w8: U1.16 2465,3173.64 2465,3195 2535,3265 J2.11
PA7: J2.12 U1.17 | length 207.5
  Top Layer w8: J2.12 2440,3260 2440,3170.8 U1.17
PA8: J4.16 U1.29 | length 805.1
  Top Layer w8: J4.16 2004.03,2705.97 1939.3,2705.97 1920,2725.27 1920,2794.73 1929.35,2804.08 2290.92,2804.08 2295,2800 2420.68,2800 U1.29
PA9: J4.15 U1.30 | length 436.8
  Top Layer w8: J4.15 2149.97,2669.97 2149.97,2699.97 2185,2735 2383.52,2735 U1.30
PA10: J4.14 U1.31 | length 350.8
  Top Layer w8: J4.14 2245,2705 2255,2715 2391.36,2715 U1.31
PA11: J4.13 R7.2 U1.32 | length 1123.1
  Top Layer w8: J4.13 2352.87,2672.87 2377.07,2672.87 U1.32
  Bottom Layer w8: R7.2 1914.23,3070.3 1939.7,3070.3 1950,3060 1950,2796.64 1995,2751.64 1995,2635 2020,2610 2290,2610 J4.13
PA12: J4.12 R8.2 R9.1 U1.33 | length 1340.3
  Top Layer w8: v1@1805,2770 v1(1804.03,2769.03) 1804.03,2605.97 1825,2585 2425,2585 2445,2605 J4.12 2445,2712.97 U1.33
  Bottom Layer w8: v1(1804.03,2769.03) 1804.03,2804.03 1900,2900 R8.2 1900,3014.06 R9.1
PA15: J4.11 U1.38 | length 236.3
  Top Layer w8: J4.11 2590,2710 2675.52,2710 2702.76,2737.24 2702.76,2741 U1.38
PB0: J2.13 U1.18 | length 279.1
  Top Layer w8: J2.13 2389.73,3265 2395,3259.73 2395,3188.27 2504.72,3078.55 U1.18
PB1: J2.14 U1.19 | length 328.9
  Top Layer w8: J2.14 2250.97,3259.03 2285.97,3259.03 2369.55,3175.45 2379.67,3175.45 U1.19
PB3: J4.10 U1.39 | length 192.2
  Top Layer w8: J4.10 2652.12,2661.51 2657.65,2661.51 2730.47,2726.8 2730.64,2726.98 2733.28,2729.61 2733.28,2738.32 2730.64,2740.96 U1.39
PB4: J4.09 U1.40 | length 195
  Top Layer w8: U1.40 2785,2714.44 2785,2692.57 2757.43,2665 J4.09
PB5: J4.08 U1.41 | length 204.2
  Top Layer w8: U1.41 2836.21,2691.07 2836.21,2673.79 J4.08
PB6: J4.07 U1.42 | length 285.9
  Top Layer w8: U1.42 2825.12,2730 2865,2730 2917.53,2677.47 2920.1,2677.47 2932.57,2665 J4.07
PB7: J4.06 U1.43 | length 377.8
  Top Layer w8: U1.43 2740.99,2842.28 2828.27,2755 2870,2755 2915,2710 2980,2710 2982.64,2707.36 3003.34,2686.66 3016.21,2673.79 3036.21,2673.79 J4.06
PB8: J4.05 U1.45 | length 462.1
  Top Layer w8: U1.45 2769.88,2870.12 2769.88,2869.07 2858.95,2780 2885,2780 2930,2735 3075,2735 J4.05
PB9: J4.04 U1.46 | length 553.3
  Top Layer w8: U1.46 2861.47,2805 2890,2805 2940,2755 3115,2755 3117.64,2752.36 3200.02,2669.98 3205,2665 J4.04
PB10: J2.15 U1.21 | length 412.6
  Top Layer w8: J2.15 2187.06,3265 2302.06,3150 2349.44,3150 U1.21
PB11: J2.16 U1.22 | length 504.8
  Top Layer w8: J2.16 2055,3265 2105,3215 2211.61,3215 2299.81,3126.8 2344.8,3126.8 U1.22 U1.22@2448.73,3022.56
PB12: J4.20 U1.25 | length 904.8
  Top Layer w8: J4.20 1645,2677.43 1657.47,2689.9 1657.47,2722.47 1816,2881 2390.32,2881 2400.36,2891.04 U1.25
PB13: J4.19 U1.26 | length 853.3
  Top Layer w8: J4.19 1745,2780 1827.71,2862.71 1831.79,2863 2397.78,2863 2400.17,2864.79 2407.2,2870.04 U1.26
PB14: J4.18 U1.27 | length 788.5
  Top Layer w8: J4.18 1845,2825 1862.78,2842.78 1865,2845 2405.23,2845 2407.87,2847.64 2412.64,2847.64 U1.27
PB15: J4.17 U1.28 | length 804.4
  Top Layer w8: J4.17 1940.03,2669.97 1910.03,2669.97 1875,2705 1875,2810 1890,2825 2417.84,2825 2420.47,2827.64 U1.28
PC13: J2.02 R2.2 U1.2 | length 1178.2
  Top Layer w8: U1.2 2821.71,3034 2839,3034 2859.77,3054.77 2875.23,3054.77 2910.11,3019.89 2910.11,2949.89 2943.84,2916.16 2972.5,2916.16 2981.34,2925 3074.73,2925 3080,2919.73 3080,2915.27 3085.27,2910 3115,2910 3160,2955 3343.45,2955 3385,2996.55 3385,3020.15 3366.2,3038.95 3366.05,3038.95 3355,3050 v1(3355,3160) 3357.24,3162.24 3357.24,3207.24 3410.03,3260.03 3440.03,3260.03 J2.02
  Bottom Layer w8: v1(3355,3160) 3389.73,3160 3395,3154.73 R2.2
PC14: C7.1 J2.03 U1.3 Y1.4 | length 1099.5
  Top Layer w8: U1.3 2811.87,3052 2831.1,3052 2859.1,3080 2880,3080 2955,3005 v1(2955,2940) ; v1(3100,2940) 3100,2965 3120,2985 3339.73,2985 v1(3345,2990.27) 3300,3035.27 3300,3220 J2.03
  Bottom Layer w8: v1(2955,2940) 2958.16,2940 2972.16,2926 3082.84,2926 3096.84,2940 v1(3100,2940) ; C7.1 3325.74,3009.53 v1(3345,2990.27)
PC15: C10.1 J2.04 U1.4 Y1.1 | length 820.8
  Top Layer w8: U1.4 2808.19,3076.16 2829.8,3076.16 2853.64,3100 2890,3100 2971.5,3018.5 3063.5,3018.5 3114.94,3069.94 3152.43,3069.94 Y1.1 ; v1(3174.02,3010.98) Y1.1 ; J2.04 3174.02,3194.02 Y1.1
  Bottom Layer w8: v1(3174.02,3010.98) 3213.54,3010.98 C10.1
RST: C2.1 J2.17 R3.1 S1.3 S1.4 U1.7 | length 4036
  Top Layer w8: S1.4 2235.39,2765 v1(2280,2765) ; v1(2700,2970.84) 2696.84,2970.84 2681.87,2985.81 2664.19,2985.81 2653.52,2996.48 2653.52,3005 U1.7
  Top Layer w20: S1.3 S1.4
  Bottom Layer w8: J2.17 1937.53,3272.47 1937.53,3297.47 1915,3320 1795.27,3320 1790,3314.73 1790,3180 1825,3145 1920,3145 1975,3090 2149.73,3090 2155,3084.73 2155,2920 2280,2795 v1(2280,2765) ; C2.1 2065,2790 2090,2765 v1(2280,2765) ; R3.1 2309.61,2765 v1(2280,2765) ; v1(2700,2970.84) 2725.84,2945 2765,2945 2895,2815 3280,2815 3395,2700 3395,2650 3355,2610 2395.27,2610 2390,2615.27 2390,2725 2380,2735 2292.21,2735 2282.24,2744.97 2282.24,2762.76 v1(2280,2765)
SWCLK: J1.02 U1.37 | length 2121.9
  Top Layer w8: v1(2620,2950) 2625,2945 2625,2793.62 2657.16,2761.46 U1.37
  Bottom Layer w8: v1(2620,2950) 2620,2985 2680,3045 2680,3214.73 2674.73,3220 2610,3220 2597.5,3232.5 2597.5,3339.46 2602.77,3344.73 3644.73,3344.73 3650,3339.46 3650,3108.86 J1.02
SWIO: J1.03 U1.34 | length 2052.7
  Top Layer w10: v1(2495,2575) 2495,2735.13 U1.34
  Top Layer w15: J1.03 J1.03@3550,2910
  Bottom Layer w10: v1(2495,2575) 3555,2575 3715,2735 3715,3020 3695,3040 3647.34,3040 3554.86,2947.53 3554.86,2913.72 J1.03
VBAT: J2.01 U1.1 | length 1306
  Top Layer w8: v2(2735,2985) 2755,2965 2780.55,2965 U1.1
  Bottom Layer w8: v2(2735,2985) 2735,3205 2688.94,3251.06 2688.94,3300.79 2694.21,3306.06 3503.94,3306.06 J2.01
pads on no net: X1.0 Y1.2 Y1.3
copper on no net:
  other v3: 3363,3022

## Polygon pours and split planes (outlines as drawn)
GND on Bottom Layer "GND_L02_P001" (solid, remove dead copper, pour order 1): 1575,3440 1575,2500 3715,2500 3725,2510 3725,3440 2540,3440
GND on Top Layer "GND_L01_P000" (solid, remove dead copper, pour order 0): 1575,2500 3720,2500 3720,3445 3715,3440 2680,3440 2670,3430 2660,3440 1575,3440

## Keep-outs
Top Layer:
  lines w10: 2424.19,2914.19 2425.81,2914.19 ; 2439.73,2899.73 2439.73,2900.27 ; 2698.92,3103.92 2698.92,3106.08
Keep-Out Layer:
  lines w20: 1550,2515 1550,3415 ; 1550,2465 3745,2465 3745,3470 1550,3470 1550,2465

## Text inside footprints (layer, text, board x,y; h text height)
P1: Top Overlay "1" at 2290,3156.7 h50 r180; Top Overlay "2" at 2310,3056.7 h50 r180; Top Overlay "5" at 1950,3156.7 h50 r180; Top Overlay "6" at 1950,3056.7 h50 r180